# Altium PCB 夏友.PcbDoc (part 4 of 6)
Units mm, origin at the board's own origin, x right, y up, seen from the top; angles counter-clockwise.
Board outline 130.55 x 65.02 mm, 2 copper layers (Top Layer, Bottom Layer); 162 components, 175 nets, 628 pads, 694 vias.
Unrouted connection lines stored in the file: 1.
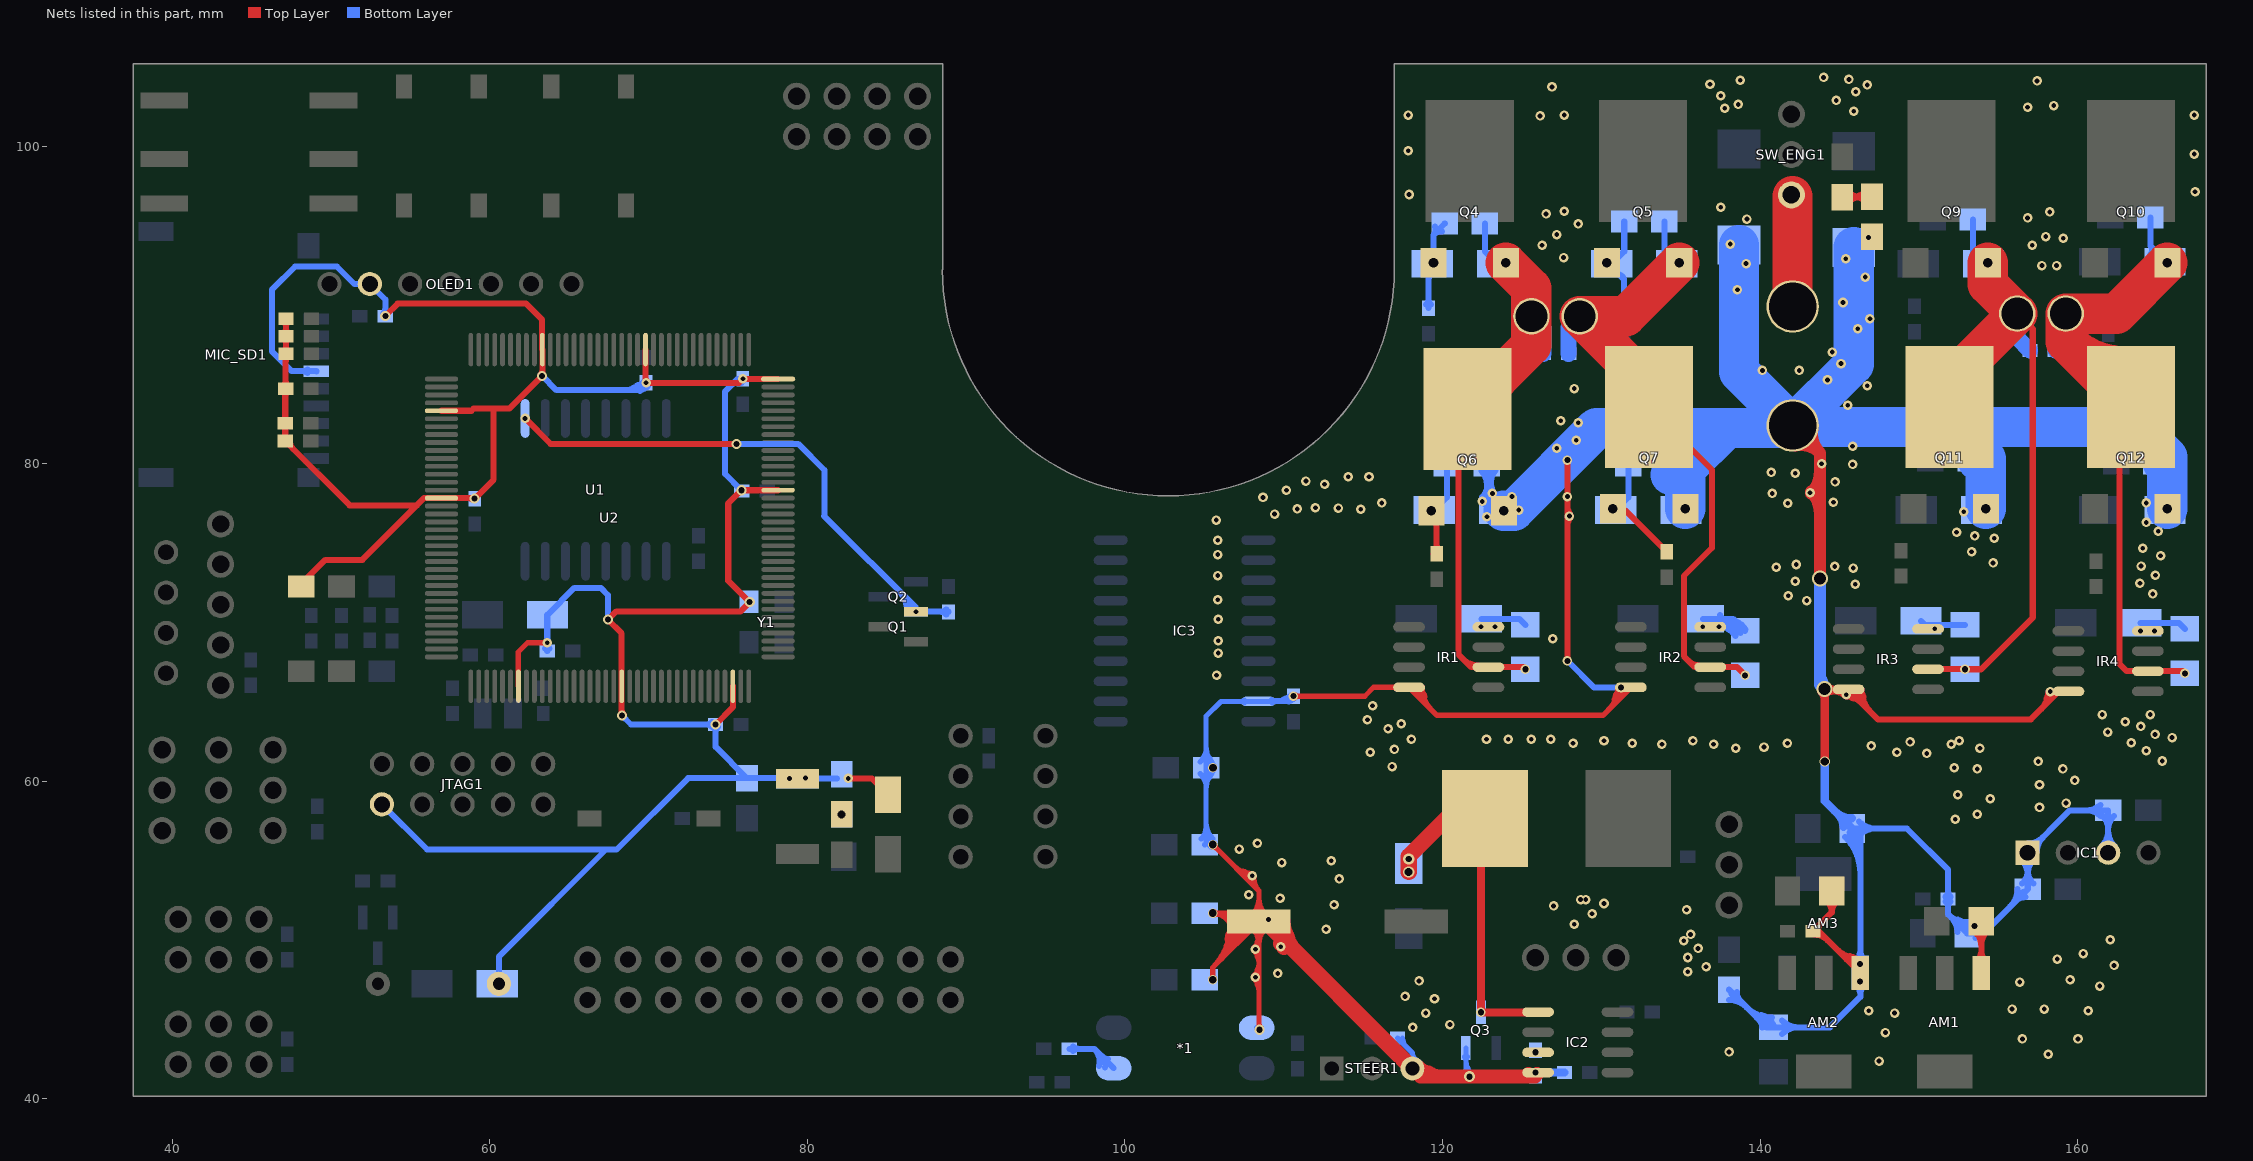
[diagram p4: the nets of this part, all layers, seen from the top]

## Via types
v1: diameter 0.6, hole 0.3, Top Layer to Bottom Layer, 442 vias
v2: diameter 0.635, hole 0.381, Top Layer to Bottom Layer, 150 vias
v3: diameter 0.6, hole 0.381, Top Layer to Bottom Layer, 48 vias
v4: diameter 0.7, hole 0.6, Top Layer to Bottom Layer, 16 vias
v5: diameter 0.6, hole 0.5, Top Layer to Bottom Layer, 10 vias
v6: diameter 0.6, hole 0.4, Top Layer to Bottom Layer, 7 vias
v7: diameter 0.7, hole 0.5, Top Layer to Bottom Layer, 5 vias
v8: diameter 0.6, hole 0.33, Top Layer to Bottom Layer, 5 vias
v9: diameter 0.7, hole 0.4, Top Layer to Bottom Layer, 3 vias
v10: diameter 1, hole 1, Top Layer to Bottom Layer, 2 vias
v11: diameter 3, hole 3, Top Layer to Bottom Layer, 2 vias
v12: diameter 1.016, hole 0.762, Top Layer to Bottom Layer, 2 vias
v13: diameter 0.7, hole 0.381, Top Layer to Bottom Layer, 1 vias
v14: diameter 0.635, hole 0.508, Top Layer to Bottom Layer, 1 vias

## Nets (pads, with @x,y where several pads share a name; then routed paths per layer and width w, separated by ;. In a path a pad name is that pad's centre, name@x,y a point inside that pad or via, vN(x,y) a via of type N, cw(c..) or ccw(c..) an arc to the next point about the centre after c; other vN are vias at no path point) (continued)
GND: *1.3 AM1.1 AM2.1 AM3.1 C2.1 C7.2 C8.2 C9.2 C10.2 C12.2 C14.2 CA1.2 CA2.2 CA3.2 CA4.2 CIN1.2 CO1.2 CO2.2 CO3.2 CON1.1 D11.1 D12.1 D18.1 D19.1 IC1.1 IC1.3 IC2.4 IC3.19 IR1.4 IR2.4 IR3.4 IR4.4 Q3.3 Q6.3 Q7.3 Q11.3 Q12.3 R2.2 R7.2 R8.1 R9.2 R19.2 R20.2 R28.2 R29.2 R30.2 R31.2 R38.2 R40.2 STEER1.3 | length 673.1
  Top Layer w0.33: v5(105.537,47.498) 105.537,48.266 ; v5(105.537,56.007) 108.446,53.098 ; 106.43,50.039 cw(c108.234,49.738) CIN1.2@107.171,51.227 ; 106.712,49.983 cw(c108.206,49.689) CIN1.2@107.357,50.954 ; CIN1.2@106.713,50.842 cw(c106.247,50.529) CIN1.2@106.798,50.421 ; CIN1.2@106.833,50.711 cw(c106.43,50.214) 107.058,50.091 cw(c107.83,49.939) CIN1.2@107.476,50.642 ; 107.44,54.342 cw(c107.241,53.597) v1@107.908,53.983 ; v1@107.937,53.947 cw(c107.438,53.361) 108.206,53.422 ; v1@108.348,47.595 ccw(c108.81,47.388) 108.372,47.135 ; v1@108.348,47.705 cw(c108.81,47.912) 108.372,48.165 ; v1@108.348,49.37 ccw(c108.81,49.163) 108.372,48.91 ; v1@108.348,49.48 cw(c108.81,49.687) 108.372,49.94 ; v2(108.475,44.35) 108.446,44.379 CIN1.2@108.446,51.175 ; v3(110.617,65.354) 115.104,65.354 115.675,65.925 117.884,65.925 IR1.4@117.896,65.913 119.659,64.15 130.103,64.15 IR2.4@131.866,65.913 ; IR1.4@118.529,65.796 cw(c118.143,65.129) 118.888,65.328 ; 130.874,65.328 cw(c131.619,65.129) 131.233,65.796 ccw(c131.474,65.379) 131.009,65.504 ; 130.958,65.315 cw(c131.703,65.116) IR2.4@131.317,65.783 ; 130.958,65.521 ccw(c130.579,65.9) IR2.4@131.115,65.9 ; IR2.4@131.039,65.869 cw(c130.606,65.719) 130.93,65.396 ccw(c130.478,65.847) IR2.4@131.115,65.891 ; 131.057,65.62 ccw(c130.882,65.795) IR2.4@131.12,65.863 ; 105.537,47.824 cw(c105.211,47.824) 105.442,47.593 ccw(c105.211,47.824) 105.537,47.824 ; 105.537,47.824 ccw(c105.863,47.824) 105.632,47.593 cw(c105.863,47.824) 105.537,47.824 ; 105.537,48.266 ccw(c102.92,50.883) 106.613,51.134 cw(c102.92,50.883) 105.537,48.266 ; 105.537,48.266 CIN1.2@108.446,51.175 ; v5(105.537,51.689) cw(c105.537,50.473) 106.658,50.944 ccw(c105.537,50.473) v5(105.537,51.689) ; v5(105.537,51.689) 107.932,51.689 CIN1.2@108.446,51.175 ; v5@105.604,51.572 cw(c105.767,51.29) 105.852,51.605 ; v5@105.604,51.572 cw(c105.767,51.29) 105.852,51.605 ; v5@105.604,51.572 cw(c105.767,51.29) 105.852,51.605 ; v5@105.654,51.756 ccw(c105.936,51.919) 105.852,51.605 ; v5@105.654,51.756 ccw(c105.936,51.919) 105.852,51.605 ; v5@105.654,51.756 ccw(c105.936,51.919) 105.852,51.605 ; 105.767,55.777 cw(c105.998,56.007) 105.672,56.007 ccw(c105.998,56.007) 105.767,55.777 ; 105.767,55.777 ccw(c105.537,55.546) 105.537,55.872 cw(c105.537,55.546) 105.767,55.777 ; 105.863,51.689 cw(c105.863,52.015) 105.632,51.784 ccw(c105.863,52.015) 105.863,51.689 ; 105.863,51.689 ccw(c105.863,51.363) 105.632,51.594 cw(c105.863,51.363) 105.863,51.689 ; 108.446,49.734 cw(c109.887,49.734) 108.868,50.753 ccw(c109.887,49.734) 108.446,49.734 ; 108.446,49.734 ccw(c107.005,49.734) 108.024,50.753 cw(c107.005,49.734) 108.446,49.734 ; CIN1.2@108.446,51.175 108.446,53.098 ; 108.446,52.616 cw(c107.005,52.616) 108.024,51.597 ccw(c107.005,52.616) 108.446,52.616 ; 108.446,52.616 ccw(c109.887,52.616) 108.868,51.597 cw(c109.887,52.616) 108.446,52.616 ; 108.446,53.098 cw(c109.184,53.836) 108.158,54.026 ccw(c109.184,53.836) 108.446,53.098 ; CIN1.2@108.869,51.596 ccw(c109.177,51.774) CIN1.2@109.085,51.43 ; CIN1.2@108.869,51.596 ccw(c109.177,51.774) CIN1.2@109.085,51.43 ; CIN1.2@108.869,51.596 ccw(c109.177,51.774) CIN1.2@109.085,51.43 ; CIN1.2@108.869,51.596 ccw(c109.177,51.774) CIN1.2@109.085,51.43 ; CIN1.2@108.869,51.596 ccw(c109.177,51.774) CIN1.2@109.085,51.43 ; CIN1.2@108.869,51.596 ccw(c109.177,51.774) CIN1.2@109.085,51.43 ; CIN1.2@108.89,51.559 cw(c108.634,51.411) CIN1.2@108.92,51.335 ; CIN1.2@108.89,51.559 cw(c108.634,51.411) CIN1.2@108.92,51.335 ; CIN1.2@108.89,51.559 cw(c108.634,51.411) CIN1.2@108.92,51.335 ; CIN1.2@108.89,51.559 cw(c108.634,51.411) CIN1.2@108.92,51.335 ; CIN1.2@108.89,51.559 cw(c108.634,51.411) CIN1.2@108.92,51.335 ; CIN1.2@108.89,51.559 cw(c108.634,51.411) CIN1.2@108.92,51.335 ; 110.943,65.354 cw(c110.943,65.68) 110.712,65.45 ccw(c110.943,65.68) 110.943,65.354 ; 110.943,65.354 ccw(c110.943,65.029) 110.712,65.259 cw(c110.943,65.029) 110.943,65.354 ; 130.824,65.14 cw(c131.847,64.866) IR2.4@131.317,65.783 ; 130.824,65.14 cw(c131.847,64.866) IR2.4@131.317,65.783 ; 130.824,65.14 cw(c131.847,64.866) IR2.4@131.317,65.783 ; IR2.4@131.115,65.9 cw(c129.334,65.9) 130.593,64.64 ccw(c129.334,65.9) IR2.4@131.115,65.9 ; IR2.4@131.156,65.804 cw(c130.922,65.565) 131.245,65.478 ; IR2.4@131.156,65.804 cw(c130.922,65.565) 131.245,65.478 ; IR2.4@131.156,65.804 cw(c130.922,65.565) 131.245,65.478 ; 106.034,51.689 cw(c106.034,50.682) 106.962,51.072 ccw(c106.034,50.682) 106.034,51.689 ; 106.051,48.78 ccw(c103.882,50.949) 106.942,51.157 cw(c103.882,50.949) 106.051,48.78 ; CIN1.2@106.531,51.689 cw(c106.531,50.891) 107.267,51.2 ccw(c106.531,50.891) CIN1.2@106.531,51.689 ; 106.564,49.293 ccw(c104.843,51.014) 107.272,51.179 cw(c104.843,51.014) 106.564,49.293 ; 106.888,54.656 ccw(c108.025,55.793) 108.025,54.185 cw(c108.025,55.793) 106.888,54.656 ; 107.078,49.807 ccw(c105.805,51.08) 107.601,51.202 cw(c105.805,51.08) 107.078,49.807 ; 107.452,54.092 ccw(c108.025,54.665) 108.025,53.855 cw(c108.025,54.665) 107.452,54.092 ; 107.592,50.32 ccw(c106.767,51.145) 107.93,51.224 cw(c106.767,51.145) 107.592,50.32 ; v1@107.833,54.085 ccw(c108.434,53.975) 108.002,53.542 cw(c108.434,53.975) v1@107.833,54.085 ; CIN1.2@108.105,50.834 ccw(c107.729,51.21) 108.26,51.247 cw(c107.729,51.21) CIN1.2@108.105,50.834 ; v1@108.13,47.555 cw(c107.365,46.79) 108.446,46.79 ccw(c107.365,46.79) v1@108.13,47.555 ; v1@108.13,47.745 ccw(c107.365,48.51) 108.446,48.51 cw(c107.365,48.51) v1@108.13,47.745 ; v1@108.13,49.33 cw(c107.365,48.565) 108.446,48.565 ccw(c107.365,48.565) v1@108.13,49.33 ; v1@108.13,49.52 ccw(c107.365,50.285) 108.446,50.285 cw(c107.365,50.285) v1@108.13,49.52 ; 108.446,44.787 ccw(c108.912,44.787) 108.583,44.458 cw(c108.912,44.787) 108.446,44.787 ; 116.841,65.925 cw(c116.841,65.558) 117.101,65.818 ccw(c116.841,65.558) 116.841,65.925 ; IR1.4@118.07,65.913 ccw(c118.492,65.913) 118.194,65.615 cw(c118.492,65.913) IR1.4@118.07,65.913 ; IR1.4@118.401,65.913 ccw(c119.619,65.913) 118.758,65.051 cw(c119.619,65.913) IR1.4@118.401,65.913 ; IR1.4@118.731,65.913 ccw(c120.747,65.913) 119.321,64.488 cw(c120.747,65.913) IR1.4@118.731,65.913 ; 130.441,64.488 ccw(c129.015,65.913) 131.031,65.913 cw(c129.015,65.913) 130.441,64.488 ; 131.004,65.051 ccw(c130.143,65.913) 131.361,65.913 cw(c130.143,65.913) 131.004,65.051 ; 131.157,65.204 ccw(c130.461,65.9) 131.445,65.9 cw(c130.461,65.9) 131.157,65.204 ; IR2.4@131.568,65.615 ccw(c131.27,65.913) 131.691,65.913 cw(c131.27,65.913) IR2.4@131.568,65.615
  Top Layer w0.381: v3(127.875,67.575) v3(127.875,80.225) ; v1@127.913,76.634 cw(c127.718,76.487) 127.929,76.366 ; v1@127.913,76.766 ccw(c127.718,76.913) 127.929,77.034 ; v12@144.064,65.786 IR3.4@145.582,65.786 ; v12@144.211,65.526 cw(c144.698,64.694) IR3.4@144.948,65.626 ; v12@144.325,65.959 ccw(c144.8,66.233) IR3.4@144.658,65.703 ; CA4.2@144.529,53.086 144.529,51.743 ; 144.56,65.726 cw(c144.651,65.386) IR3.4@144.827,65.691 ; IR3.4@144.922,65.618 ccw(c145.235,66.16) IR3.4@145.397,65.556 ; IR3.4@145.52,65.505 ccw(c146.062,65.817) 145.9,65.213 ; 145.648,48.995 cw(c145.355,47.9) AM2.1@146.337,48.467 ; AM2.1@145.825,48.737 cw(c145.663,48.133) AM2.1@146.205,48.445 ; AM2.1@145.971,48.362 ccw(c145.662,48.279) 145.745,48.588 ccw(c145.819,48.863) AM2.1@146.039,48.683 ; IR3.4@146.227,65.691 cw(c145.914,65.149) 146.519,65.311 ; AM2.1@146.318,47.931 143.703,50.546 CA2.2@143.332,50.546 144.529,51.743 ; CO1.2@153.443,50.782 cw(c153.264,50.49) CO1.2@153.606,50.49 ; CO1.2@153.522,50.768 cw(c153.609,50.342) CO1.2@153.985,50.559 ; CO1.2@153.668,50.372 cw(c154.21,50.685) CO1.2@153.606,50.847 ; CO1.2@153.927,51.181 153.938,51.17 AM1.1@153.938,47.931 ; 158.038,65.175 cw(c158.642,65.013) v1@158.33,65.555 ; IR4.4@159.425,65.659 158.809,65.659 157.05,63.9 147.425,63.9 145.582,65.743 IR3.4@145.582,65.786 ; 144.529,51.743 cw(c145.492,51.743) 144.902,52.504 ccw(c145.492,51.743) 144.529,51.743 ; 144.529,51.743 ccw(c143.566,51.743) 144.156,52.504 cw(c143.566,51.743) 144.529,51.743 ; IR3.4@145.582,65.786 cw(c145.346,65.786) 145.4,65.557 ccw(c145.346,65.786) IR3.4@145.582,65.786 ; AM2.1@145.893,48.548 ccw(c146.013,48.997) AM2.1@146.245,48.595 ; AM2.1@145.893,48.548 ccw(c146.013,48.997) AM2.1@146.245,48.595 ; AM2.1@145.893,48.548 ccw(c146.013,48.997) AM2.1@146.245,48.595 ; CO1.2@153.606,50.847 ccw(c154.243,50.676) CO1.2@153.672,50.346 ; CO1.2@153.606,50.847 ccw(c154.243,50.676) CO1.2@153.672,50.346 ; CO1.2@153.606,50.847 ccw(c154.243,50.676) CO1.2@153.672,50.346 ; 153.938,49.324 cw(c153.07,49.324) 153.684,48.71 ccw(c153.07,49.324) 153.938,49.324 ; 153.938,49.324 ccw(c154.806,49.324) 154.192,48.71 cw(c154.806,49.324) 153.938,49.324 ; v1@158.288,65.379 ccw(c158.271,65.728) IR4.4@158.607,65.63 ; v1@158.288,65.379 ccw(c158.271,65.728) IR4.4@158.607,65.63 ; v1@158.288,65.379 ccw(c158.271,65.728) IR4.4@158.607,65.63 ; 127.875,76.134 cw(c128.566,76.134) 128.077,76.623 ccw(c128.566,76.134) 127.875,76.134 ; 127.875,77.266 ccw(c128.566,77.266) 128.077,76.777 cw(c128.566,77.266) 127.875,77.266 ; CA2.2@143.415,50.337 cw(c143.415,49.135) 144.264,49.985 ccw(c143.415,49.135) CA2.2@143.415,50.337 ; CA2.2@143.624,50.546 cw(c144.329,50.546) 143.831,51.044 ccw(c144.329,50.546) CA2.2@143.624,50.546 ; v12@144.275,65.575 cw(c144.783,65.067) 144.783,65.786 ccw(c144.783,65.067) v12@144.275,65.575 ; v12@144.275,66.025 ccw(c144.85,66.6) 144.85,65.786 cw(c144.85,66.6) v12@144.275,66.025 ; v12@144.349,65.786 cw(c144.349,64.374) 145.348,65.373 ccw(c144.349,64.374) v12@144.349,65.786 ; 144.808,49.441 ccw(c146.318,50.951) 146.318,48.815 cw(c146.318,50.951) 144.808,49.441 ; 145.172,49.077 ccw(c146.3,50.204) 146.3,48.609 cw(c146.3,50.204) 145.172,49.077 ; IR3.4@145.269,65.786 cw(c145.269,65.294) 145.617,65.642 ccw(c145.269,65.294) IR3.4@145.269,65.786 ; v1@145.425,65.341 cw(c145.425,63.99) 146.38,64.945 ccw(c145.425,63.99) v1@145.425,65.341 ; IR3.4@145.425,65.722 cw(c145.425,65.291) 145.73,65.595 ccw(c145.425,65.291) IR3.4@145.425,65.722 ; 145.458,48.791 ccw(c146.318,49.65) 146.318,48.434 cw(c146.318,49.65) 145.458,48.791 ; IR3.4@145.629,65.786 ccw(c145.848,65.786) 145.693,65.632 cw(c145.848,65.786) IR3.4@145.629,65.786 ; AM2.1@145.823,48.426 ccw(c146.3,48.903) 146.3,48.228 cw(c146.3,48.903) AM2.1@145.823,48.426 ; IR3.4@146.01,65.786 ccw(c147.149,65.786) 146.344,64.981 cw(c147.149,65.786) IR3.4@146.01,65.786 ; IR3.4@146.391,65.786 ccw(c148.45,65.786) 146.994,64.331 cw(c148.45,65.786) IR3.4@146.391,65.786 ; CO1.2@153.423,50.798 cw(c152.178,49.553) 153.938,49.553 ccw(c152.178,49.553) CO1.2@153.423,50.798 ; CO1.2@153.496,50.65 cw(c152.429,49.583) 153.938,49.583 ccw(c152.429,49.583) CO1.2@153.496,50.65 ; CO1.2@153.692,51.067 cw(c153.098,50.473) 153.938,50.473 ccw(c153.098,50.473) CO1.2@153.692,51.067 ; 153.938,49.636 cw(c155.372,49.636) 154.358,50.65 ccw(c155.372,49.636) 153.938,49.636 ; 157.717,64.567 ccw(c156.634,65.65) 158.166,65.65 cw(c156.634,65.65) 157.717,64.567 ; 158.367,65.217 ccw(c157.934,65.65) 158.547,65.65 cw(c157.934,65.65) 158.367,65.217 ; 158.479,65.329 ccw(c158.148,65.659) 158.615,65.659 cw(c158.148,65.659) 158.479,65.329
  Top Layer w0.508: v12(144.05,65.8) 144.064,65.786 144.075,65.775 v14(144.075,61.25) ; v12@143.87,65.62 cw(c143.376,65.126) 144.075,65.126 ccw(c143.376,65.126) v12@143.87,65.62 ; 144.075,65.247 cw(c144.603,65.247) 144.23,65.62 ccw(c144.603,65.247) 144.075,65.247
  Top Layer w0.762: CON1.1@142.05,82.406 143.775,80.681 ; v12(143.775,72.775) 143.775,80.681 ; 143.775,80.681 cw(c144.984,81.89) 143.3,82.186 ccw(c144.984,81.89) 143.775,80.681 ; 143.775,80.681 ccw(c142.566,79.472) 142.27,81.156 cw(c142.566,79.472) 143.775,80.681 ; v1@143.207,78.118 ccw(c141.837,79.488) 143.775,79.488 cw(c141.837,79.488) v1@143.207,78.118 ; v1@143.207,78.232 cw(c141.837,76.862) 143.775,76.862 ccw(c141.837,76.862) v1@143.207,78.232
  Top Layer w0.889: STEER1.3@118.11,41.91 118.62,41.4 v9(121.7,41.4) IC2.4@125.818,41.4 ; STEER1.3@118.232,41.63 cw(c118.701,40.55) 119.29,41.57 ; STEER1.3@118.326,42.126 ccw(c120.079,43.879) 120.079,41.4 cw(c120.079,43.879) STEER1.3@118.326,42.126 ; 125.055,41.4 ccw(c125.055,41.925) 125.426,41.554 cw(c125.055,41.925) 125.055,41.4 ; IC2.4@125.588,41.4 ccw(c125.588,41.925) 125.959,41.554 cw(c125.588,41.925) IC2.4@125.588,41.4
  Top Layer w1.016: CIN1.2@108.446,51.175 108.845,51.175 STEER1.3@118.11,41.91 ; CIN1.2@109.557,50.955 cw(c108.832,49.699) 110.233,50.074 ; 109.742,50.278 cw(c109.038,49.575) 110.033,49.575 ccw(c109.038,49.575) 109.742,50.278 ; v1@109.825,49.783 cw(c109.825,48.788) 110.528,49.492 ccw(c109.825,48.788) v1@109.825,49.783 ; CIN1.2@109.938,51.175 ccw(c112.577,51.175) 110.711,49.309 cw(c112.577,51.175) CIN1.2@109.938,51.175
  Bottom Layer w0.33: R28.2@105.024,56.007 105.115,56.098 R31.2@105.115,60.85 105.115,64.09 106.049,65.024 IC3.19@108.409,65.024 110.287,65.024 v3(110.617,65.354) ; R28.2@105.094,56.398 ccw(c105.537,56.654) R28.2@105.537,56.142 ; R31.2@105.095,60.439 cw(c105.573,60.163) R31.2@105.555,60.715 ; R31.2@105.095,61.261 ccw(c105.573,61.537) R31.2@105.555,60.985 ; R28.2@105.33,56.627 cw(c104.662,56.241) R28.2@105.407,56.042 ; R31.2@105.343,60.23 ccw(c104.675,60.616) R31.2@105.42,60.815 ; R31.2@105.343,61.47 cw(c104.675,61.084) R31.2@105.42,60.885 ; *1.3@108.3,44.47 108.42,44.35 v2(108.475,44.35) ; 109.931,65.138 cw(c110.166,64.731) C14.2@110.466,65.091 ; 110.165,65.224 cw(c110.165,64.82) C14.2@110.451,65.106 ; C14.2@110.411,65.385 cw(c110.139,65.535) 110.139,65.224 ccw(c110.139,65.653) C14.2@110.503,65.426 ; C2.1@117.175,43.825 118.11,42.89 ; STEER1.3@118.11,41.91 118.11,42.89 ; Q3.3@121.478,43.198 121.478,41.572 121.669,41.424 v9(121.7,41.4) ; R8.1@121.549,41.507 ccw(c121.189,41.761) 121.571,41.981 ; 105.115,59.595 cw(c106.37,59.595) 105.483,60.482 ccw(c106.37,59.595) 105.115,59.595 ; 105.115,59.595 ccw(c103.86,59.595) 104.747,60.482 cw(c103.86,59.595) 105.115,59.595 ; 105.115,62.105 cw(c103.86,62.105) 104.747,61.218 ccw(c103.86,62.105) 105.115,62.105 ; 105.115,62.105 ccw(c106.37,62.105) 105.483,61.218 cw(c106.37,62.105) 105.115,62.105 ; 107.308,65.024 cw(c107.308,64.698) 107.539,64.929 ccw(c107.308,64.698) 107.308,65.024 ; 107.308,65.024 ccw(c107.308,65.35) 107.539,65.119 cw(c107.308,65.35) 107.308,65.024 ; IC3.19@109.251,65.141 ccw(c109.533,65.628) 109.678,65.085 ; IC3.19@109.251,65.141 ccw(c109.533,65.628) 109.678,65.085 ; IC3.19@109.251,65.141 ccw(c109.533,65.628) 109.678,65.085 ; 109.51,65.024 cw(c109.51,65.35) 109.279,65.119 ccw(c109.51,65.35) 109.51,65.024 ; 109.51,65.024 ccw(c109.51,64.698) 109.279,64.929 cw(c109.51,64.698) 109.51,65.024 ; 109.932,65.138 cw(c110.36,64.397) C14.2@110.582,65.224 ; 109.932,65.138 cw(c110.36,64.397) C14.2@110.582,65.224 ; 109.932,65.138 cw(c110.36,64.397) C14.2@110.582,65.224 ; C14.2@110.327,64.998 ccw(c110.165,65.278) C14.2@110.484,65.332 ; C14.2@110.327,64.998 ccw(c110.165,65.278) C14.2@110.484,65.332 ; C14.2@110.327,64.998 ccw(c110.165,65.278) C14.2@110.484,65.332 ; C14.2@110.387,65.124 cw(c110.617,64.894) 110.617,65.219 ccw(c110.617,64.894) C14.2@110.387,65.124 ; C14.2@110.387,65.124 ccw(c110.156,65.354) 110.482,65.354 cw(c110.156,65.354) C14.2@110.387,65.124 ; 118.11,42.89 cw(c117.582,42.89) 117.832,42.425 ccw(c117.582,42.89) 118.11,42.89 ; 118.11,42.89 ccw(c118.638,42.89) 118.388,42.425 cw(c118.638,42.89) 118.11,42.89 ; 121.478,42.422 cw(c121.804,42.422) 121.573,42.653 ccw(c121.804,42.422) 121.478,42.422 ; 121.478,42.422 ccw(c121.152,42.422) 121.383,42.653 cw(c121.152,42.422) 121.478,42.422 ; R8.1@121.54,41.493 ccw(c121.186,41.697) 121.54,41.901 ; R8.1@121.54,41.493 ccw(c121.186,41.697) 121.54,41.901 ; R8.1@121.54,41.493 ccw(c121.186,41.697) 121.54,41.901 ; R28.2@104.806,56.375 ccw(c104.061,57.12) 105.115,57.12 cw(c104.061,57.12) R28.2@104.806,56.375 ; R28.2@105.115,56.554 ccw(c106.084,56.554) 105.399,55.869 cw(c106.084,56.554) R28.2@105.115,56.554 ; 105.115,57.351 ccw(c106.881,57.351) 105.632,56.102 cw(c106.881,57.351) 105.115,57.351 ; 105.115,57.405 ccw(c106.572,57.405) 105.542,56.375 cw(c106.572,57.405) 105.115,57.405 ; 105.115,59.474 cw(c106.926,59.474) 105.645,60.755 ccw(c106.926,59.474) 105.115,59.474 ; R31.2@105.115,60.271 cw(c106.129,60.271) 105.412,60.988 ccw(c106.129,60.271) R31.2@105.115,60.271 ; R31.2@105.115,61.429 ccw(c106.129,61.429) 105.412,60.712 cw(c106.129,61.429) R31.2@105.115,61.429 ; 105.115,62.226 ccw(c106.926,62.226) 105.645,60.945 cw(c106.926,62.226) 105.115,62.226 ; IC3.19@109.452,65.024 ccw(c109.452,66.437) 110.451,65.438 cw(c109.452,66.437) IC3.19@109.452,65.024 ; C14.2@110.249,65.024 ccw(c110.249,65.64) 110.684,65.204 cw(c110.249,65.64) C14.2@110.249,65.024 ; C2.1@117.257,43.59 cw(c117.257,43.222) 117.518,43.482 ccw(c117.257,43.222) C2.1@117.257,43.59 ; C2.1@117.492,43.825 ccw(c118.259,43.825) 117.717,43.283 cw(c118.259,43.825) C2.1@117.492,43.825 ; 121.478,42.183 ccw(c122.351,42.183) 121.734,41.566 cw(c122.351,42.183) 121.478,42.183 ; 121.478,42.382 ccw(c122.682,42.382) 121.831,41.531 cw(c122.682,42.382) 121.478,42.382
  Bottom Layer w0.381: D11.1@122.55,77.722 ccw(c122.687,77.99) D11.1@122.908,77.786 ; D11.1@122.593,77.683 ccw(c123.123,78.015) D11.1@122.983,77.406 ; D11.1@122.606,77.653 cw(c123.21,77.815) 122.668,78.128 ; D11.1@122.799,77.668 ccw(c122.648,77.906) 122.892,78.047 ccw(c123.406,78.343) D11.1@123.294,77.761 ; R19.2@122.804,79.883 122.804,77.874 D11.1@123.589,77.089 ; v1@122.955,78.036 ccw(c123.478,78.338) D11.1@123.331,77.753 ; 122.982,78.628 cw(c122.44,78.315) v1@123.044,78.153 ; v1@123.081,78.04 cw(c122.687,77.554) D11.1@123.309,77.619 ; D11.1@123.228,77.715 ccw(c124.202,78.278) D11.1@123.911,77.19 ; D11.1@123.291,77.261 ccw(c123.645,77.875) D11.1@123.829,77.19 ; v3(127.875,67.575) 129.55,65.9 v3(131.25,65.9) ; R2.2@138.049,46.868 140.417,44.5 CO2.2@140.85,44.5 144.4,44.5 146.325,46.425 146.318,46.432 AM3.1@146.318,47.954 ; R2.2@138.157,46.752 ccw(c139.258,47.092) 138.96,45.98 ; CO2.2@140.074,45.291 cw(c139.76,44.119) CO2.2@140.892,44.555 ; CO3.2@145.641,56.334 cw(c145.455,55.641) 146.077,56 ; 146.175,55.83 cw(c146.678,56.121) CO3.2@146.249,56.512 ; AM3.1@146.318,48.5 146.318,56.504 CO3.2@145.799,57.023 149.252,57.023 151.85,54.425 151.85,52.587 CA1.2@151.841,52.578 151.841,51.616 ; CA3.2@152.451,51.279 cw(c152.194,50.282) CA3.2@153.185,50.56 ; D18.1@154.075,77.016 v4(154.223,77.163) ; 155.972,52.289 cw(c157.084,51.991) C10.2@156.744,53.092 ; IC1.3@161.925,55.499 161.925,58.161 159.507,58.161 IC1.1@156.845,55.499 156.86,55.484 C10.2@156.86,53.2 154.079,50.419 ; R19.2@122.707,79.455 cw(c122.478,79.058) 122.92,79.176 ; R19.2@122.707,79.455 cw(c122.478,79.058) 122.92,79.176 ; R19.2@122.707,79.455 cw(c122.478,79.058) 122.92,79.176 ; 122.804,78.689 cw(c123.998,78.689) 123.154,79.533 ccw(c123.998,78.689) 122.804,78.689 ; 122.804,78.689 ccw(c121.61,78.689) 122.454,79.533 cw(c121.61,78.689) 122.804,78.689 ; v1@123.054,78.178 ccw(c122.621,78.415) 123.095,78.553 ; v1@123.054,78.178 ccw(c122.621,78.415) 123.095,78.553 ; v1@123.054,78.178 ccw(c122.621,78.415) 123.095,78.553 ; 123.094,78.53 cw(c124.185,78.823) R19.2@123.329,79.56 ; 123.094,78.53 cw(c124.185,78.823) R19.2@123.329,79.56 ; 123.094,78.53 cw(c124.185,78.823) R19.2@123.329,79.56 ; v1@123.137,78.016 cw(c123.085,77.582) D11.1@123.429,77.852 ; v1@123.137,78.016 cw(c123.085,77.582) D11.1@123.429,77.852 ; v1@123.137,78.016 cw(c123.085,77.582) D11.1@123.429,77.852 ; v1@123.252,78.085 ccw(c123.96,77.808) D11.1@123.316,77.403 ; v1@123.252,78.085 ccw(c123.96,77.808) D11.1@123.316,77.403 ; v1@123.252,78.085 ccw(c123.96,77.808) D11.1@123.316,77.403 ; D11.1@123.589,77.089 cw(c124.423,77.923) 123.258,78.108 ccw(c124.423,77.923) D11.1@123.589,77.089 ; D11.1@123.589,77.089 ccw(c122.557,76.057) 122.504,77.516 cw(c122.557,76.057) D11.1@123.589,77.089 ; 142.421,44.5 cw(c142.421,45.971) 141.381,44.931 ccw(c142.421,45.971) 142.421,44.5 ; 142.421,44.5 ccw(c142.421,43.029) 141.381,44.069 cw(c142.421,43.029) 142.421,44.5 ; 146.318,46.561 cw(c147.186,46.561) 146.572,47.175 ccw(c147.186,46.561) 146.318,46.561 ; 146.318,46.561 ccw(c145.45,46.561) 146.064,47.175 cw(c145.45,46.561) 146.318,46.561 ; 146.318,49.347 cw(c145.45,49.347) 146.064,48.733 ccw(c145.45,49.347) 146.318,49.347 ; 146.318,49.347 ccw(c147.186,49.347) 146.572,48.733 cw(c147.186,49.347) 146.318,49.347 ; 147.27,57.023 cw(c147.27,58.494) 146.23,57.454 ccw(c147.27,58.494) 147.27,57.023 ; 147.27,57.023 ccw(c147.27,55.552) 146.23,56.592 cw(c147.27,55.552) 147.27,57.023 ; 151.841,51.616 ccw(c153.018,52.792) 153.033,51.128 cw(c153.018,52.792) 151.841,51.616 ; 151.841,51.616 CA3.2@153.038,50.419 154.079,50.419 ; 151.841,52.072 cw(c152.347,52.072) 151.989,52.43 ccw(c152.347,52.072) 151.841,52.072 ; 151.841,52.072 ccw(c151.335,52.072) 151.693,52.43 cw(c151.335,52.072) 151.841,52.072 ; CA3.2@153.609,50.874 ccw(c154.08,50.868) CA3.2@153.743,50.539 ; CA3.2@153.609,50.874 ccw(c154.08,50.868) CA3.2@153.743,50.539 ; CA3.2@153.609,50.874 ccw(c154.08,50.868) CA3.2@153.743,50.539 ; 154.079,50.419 cw(c154.079,50.889) 153.609,50.878 ccw(c154.079,50.889) 154.079,50.419 ; 154.079,50.419 cw(c154.079,51.003) 153.57,50.717 ccw(c154.079,51.003) 154.079,50.419 ; 154.079,50.419 ccw(c154.079,49.835) 153.57,50.121 cw(c154.079,49.835) 154.079,50.419 ; 156.86,54.394 cw(c155.666,54.394) 156.51,53.55 ccw(c155.666,54.394) 156.86,54.394 ; 156.86,54.394 ccw(c158.054,54.394) 157.21,53.55 cw(c158.054,54.394) 156.86,54.394 ; 157.821,56.475 cw(c156.845,57.45) 156.845,56.07 ccw(c156.845,57.45) 157.821,56.475 ; 157.821,56.475 ccw(c158.796,55.499) 157.416,55.499 cw(c158.796,55.499) 157.821,56.475 ; 161.925,56.879 cw(c160.545,56.879) 161.521,55.903 ccw(c160.545,56.879) 161.925,56.879 ; 161.925,56.879 ccw(c163.305,56.879) 162.329,55.903 cw(c163.305,56.879) 161.925,56.879 ; D11.1@122.423,77.702 ccw(c121.502,78.623) 122.804,78.623 cw(c121.502,78.623) D11.1@122.423,77.702 ; D11.1@122.49,77.896 cw(c122.514,77.251) 122.971,77.707 ccw(c122.514,77.251) D11.1@122.49,77.896 ; D11.1@122.692,77.433 ccw(c122.422,77.703) 122.804,77.703 cw(c122.422,77.703) D11.1@122.692,77.433 ; 122.804,78.305 ccw(c123.33,78.305) 122.958,77.933 cw(c123.33,78.305) 122.804,78.305 ; 122.804,78.691 ccw(c124.766,78.691) 123.379,77.304 cw(c124.766,78.691) 122.804,78.691 ; R19.2@122.804,79.225 ccw(c124.25,79.225) 123.227,78.202 cw(c124.25,79.225) R19.2@122.804,79.225 ; R19.2@122.804,79.611 ccw(c125.686,79.611) 123.648,77.573 cw(c125.686,79.611) R19.2@122.804,79.611 ; v1@122.882,78.168 ccw(c123.511,78.068) 123.06,77.618 cw(c123.511,78.068) v1@122.882,78.168 ; D11.1@123.208,77.47 ccw(c123.87,78.132) 123.87,77.196 cw(c123.87,78.132) D11.1@123.208,77.47 ; R2.2@138.049,46.223 cw(c138.049,44.668) 139.149,45.768 ccw(c138.049,44.668) R2.2@138.049,46.223 ; R2.2@138.543,46.718 ccw(c139.375,46.718) 138.787,46.13 cw(c139.375,46.718) R2.2@138.543,46.718 ; 139.141,45.776 ccw(c140.75,47.385) 140.75,45.109 cw(c140.75,47.385) 139.141,45.776 ; 139.791,45.126 ccw(c140.75,46.084) 140.75,44.728 cw(c140.75,46.084) 139.791,45.126 ; 139.945,44.972 cw(c139.473,44.5) 140.141,44.5 ccw(c139.473,44.5) 139.945,44.972 ; CO3.2@145.368,56.492 cw(c143.075,54.199) 146.318,54.199 ccw(c143.075,54.199) CO3.2@145.368,56.492 ; CO3.2@145.637,56.761 cw(c143.994,55.118) 146.318,55.118 ccw(c143.994,55.118) CO3.2@145.637,56.761 ; CO3.2@145.907,57.031 cw(c144.914,56.038) 146.318,56.038 ccw(c144.914,56.038) CO3.2@145.907,57.031 ; AM3.1@146.223,47.323 cw(c145.992,47.092) 146.318,47.092 ccw(c145.992,47.092) AM3.1@146.223,47.323 ; AM3.1@146.223,47.477 ccw(c145.992,47.708) 146.318,47.708 cw(c145.992,47.708) AM3.1@146.223,47.477 ; AM3.1@146.223,48.577 ccw(c145.992,48.808) 146.318,48.808 cw(c145.992,48.808) AM3.1@146.223,48.577 ; CA1.2@151.693,52.726 ccw(c151.314,53.105) 151.85,53.105 cw(c151.314,53.105) CA1.2@151.693,52.726 ; 151.85,53.063 ccw(c152.326,53.063) 151.989,52.726 cw(c152.326,53.063) 151.85,53.063 ; 152.068,51.389 cw(c151.198,50.519) 152.428,50.519 ccw(c151.198,50.519) 152.068,51.389 ; CA3.2@153.229,50.869 ccw(c153.689,50.879) 153.689,50.419 cw(c153.689,50.879) CA3.2@153.229,50.869 ; 155.76,52.1 ccw(c154.66,53.2) 156.215,53.2 cw(c154.66,53.2) 155.76,52.1 ; 156.122,52.462 cw(c156.71,51.874) 156.71,52.706 ccw(c156.71,51.874) 156.122,52.462 ; IC1.1@156.441,55.095 cw(c155.429,54.083) 156.86,54.083 ccw(c155.429,54.083) IC1.1@156.441,55.095 ; 156.86,54.155 cw(c158.189,54.155) 157.249,55.095 ccw(c158.189,54.155) 156.86,54.155 ; 160.574,58.161 ccw(c160.574,59.372) 161.43,58.516 cw(c160.574,59.372) 160.574,58.161 ; 160.598,58.161 cw(c160.598,56.984) 161.43,57.816 ccw(c160.598,56.984) 160.598,58.161 ; C9.2@161.58,57.816 cw(c160.748,56.984) 161.925,56.984 ccw(c160.748,56.984) C9.2@161.58,57.816 ; 161.925,56.96 cw(c163.136,56.96) 162.28,57.816 ccw(c163.136,56.96) 161.925,56.96
  Bottom Layer w0.508: v6(125.857,41.656) R9.2@127.686,41.656 ; v14(144.075,61.25) 144.075,58.747 CO3.2@145.799,57.023 ; C12.2@125.96,41.432 cw(c126.501,40.891) 126.501,41.656 ccw(c126.501,40.891) C12.2@125.96,41.432 ; 144.696,58.126 ccw(c145.799,59.229) 145.799,57.669 cw(c145.799,59.229) 144.696,58.126 ; 144.938,57.884 cw(c144.176,57.123) 145.253,57.123 ccw(c144.176,57.123) 144.938,57.884
  Bottom Layer w0.762: v12(143.775,72.775) 143.775,66.075 v12(144.05,65.8) ; 143.855,66.383 cw(c143.227,66.021) v12@143.927,65.833 ; 143.775,66.771 ccw(c145.021,66.771) 144.14,65.89 cw(c145.021,66.771) 143.775,66.771
  Bottom Layer w2.54: v4(123.87,77.036) 124.486,77.036 129.7,82.25 137.9,82.25 ; v4(135.3,77.163) 135.3,79.65 137.9,82.25 ; C7.2@138.675,93.775 138.675,85.781 CON1.1@142.05,82.406 ; C8.2@145.9,93.625 145.9,86.256 CON1.1@142.05,82.406 ; v4(154.223,77.163) 154.223,80.302 152.218,82.307 ; v4(165.653,77.163) 165.653,80.422 163.768,82.307 152.218,82.307 ; R20.2@134.798,80.297 cw(c133.585,79.084) 135.3,79.084 ; R20.2@134.798,80.297 cw(c133.585,79.084) 135.3,79.084 ; R20.2@134.798,80.297 cw(c133.585,79.084) 135.3,79.084 ; R20.2@134.798,80.297 cw(c133.585,79.084) 135.3,79.084 ; 137.9,82.25 141.894,82.25 CON1.1@142.05,82.406 ; CON1.1@142.05,82.406 142.149,82.307 152.218,82.307 ; R20.2@134.384,79.298 ccw(c134.384,80.66) 135.347,79.697 cw(c134.384,80.66) R20.2@134.384,79.298 ; 153.258,81.267 cw(c152.191,80.2) 153.7,80.2 ccw(c152.191,80.2) 153.258,81.267 ; R29.2@153.829,80.614 cw(c152.877,79.662) 154.223,79.662 ccw(c152.877,79.662) R29.2@153.829,80.614 ; 164.935,81.14 cw(c163.805,80.01) 165.403,80.01 ccw(c163.805,80.01) 164.935,81.14
  other v1: 147.5,42.375 158.15,42.8 138.05,42.95 156.525,43.775 160.025,43.775 147.9,44.175 118.125,44.5 120.475,44.675 118.95,45.4 148.475,45.4 146.85,45.55 160.675,45.55 155.875,45.65 157.9,45.65 119.5,46.3 117.65,46.45 161.4,47.1 156.35,47.35 118.525,47.425 159.525,47.5 108.225,47.65 109.625,47.9 135.45,48 136.6,48.325 162.3,48.4 158.725,48.8 135.45,48.9 160.35,49.15 108.225,49.425 136.1,49.475 109.825,49.575 135.2,49.95 162.05,50.025 135.625,50.35 112.675,50.675 128.3,51 109.05,51.3 129.425,51.65 135.375,51.9 127,52.15 113.175,52.225 130.175,52.3 128.7,52.55 129.025,52.55 109.775,52.625 107.8,52.85 113.5,53.85 108.025,54.05 109.875,54.875 113,55 107.2,55.725 108.35,56.1 152.3,57.6 153.675,57.925 157.6,58.35 159.275,58.625 154.5,58.9 152.45,59.15 157.6,59.775 159.825,60.05 153.675,60.775 159.075,60.775 152.225,60.85 116.825,60.925 157.525,61.25 165.325,61.275 150.5,61.75 115.45,61.825 148.625,61.825 164.325,61.925 116.975,62 138.475,62.075 153.85,62.075 140.25,62.15 147,62.225 133.825,62.325 137.075,62.325 152.05,62.325 128.225,62.4 131.95,62.4 141.725,62.4 163.375,62.425 149.45,62.475 130.175,62.55 135.775,62.55 152.55,62.55 118.05,62.65 122.775,62.65 124.15,62.65 125.6,62.65 126.825,62.65 165.95,62.75 164.875,62.95 161.9,63.1 116.575,63.3 163.975,63.45 117.4,63.625 163,63.75 115.275,63.875 161.55,64.2 164.575,64.2 115.6,64.75 145.425,65.45 158.275,65.65 105.775,66.675 105.875,68.075 105.875,68.85 126.95,68.975 105.875,70.2 142.95,71.375 105.85,71.425 141.775,71.675 164.725,71.8 146,72.4 163.925,72.475 142.225,72.6 105.85,72.95 164.9,72.975 145.875,73.425 141.025,73.475 144.7,73.525 164,73.55 142.275,73.65 154.675,73.75 165.225,74.2 105.85,74.275 153.325,74.45 164.1,74.675 105.85,75.175 154.75,75.3 153.525,75.45 152.375,75.675 165.075,75.75 164.325,76.3 105.75,76.45 122.8,76.65 128,76.7 109.425,76.825 152.825,76.975 124.8,77.075 114.85,77.125 110.85,77.15 113.45,77.2 112,77.225 141.75,77.5 116.175,77.525 164.325,77.525 144.625,77.575 122.5,77.625 108.7,77.875 124.375,77.925 127.875,77.925 123.15,78.125 140.775,78.125 143.15,78.175 110.175,78.325 112.575,78.7 144.725,78.85 111.4,78.9 114.075,79.175 115.375,79.175 142.225,79.4 140.7,79.45 145.825,79.95 143.875,80 127.2,80.975 145.825,81.1 128.425,81.475 128.55,82.575 127.45,82.7 145.525,83.675 128.3,84.725 146.75,84.9 144.25,85.275 140.15,85.875 142.475,85.875 145.1,86.3 144.55,87.025 146.15,88.5 146.925,89.125 145.225,90.15 138.575,90.95 146.625,91.75 157.75,92.475 158.675,92.475 139.125,92.6 145.4,92.9 127.625,92.975 126.275,93.75 157.15,93.75 138.125,93.825 159.1,94.2 146.825,94.25 158,94.3 127.2,94.425 128.55,95.1 139.175,95.4 156.85,95.475 126.525,95.725 158.25,95.85 127.675,95.9 137.525,96.15 117.9,96.95 167.4,97.125 167.35,99.5 117.85,99.7 126.15,101.9 117.85,101.95 127.675,101.95 167.35,101.95 145.9,102.2 137.775,102.375 156.85,102.45 158.5,102.55 138.625,102.625 144.8,102.875 137.525,103.175 146.025,103.425 126.9,103.725 146.75,103.85 136.85,103.9 157.45,104.1 138.75,104.15 145.6,104.2 144,104.325
  other v3: 146.3,47.4 146.3,48.5 153.5,50.875
  other v5: 105.55,60.85
MAN_O: Q1.3 Q2.3 R1.2 U1.1 | length 38.2
  Top Layer w0.381: v1(62.23,82.85) 63.83,81.25 v2(75.55,81.25)
  Bottom Layer w0.381: v2(75.55,81.25) 79.425,81.25 81.075,79.6 81.075,76.7 81.062,76.713 81.062,76.7 86.85,70.913 v1(86.85,70.678) 88.885,70.678 R1.2@88.9,70.663 ; 85.729,72.034 cw(c84.373,70.678) Q2.3@86.291,70.678 ; 86.379,71.384 cw(c85.673,70.678) Q2.3@86.672,70.678 ; 86.497,71.266 cw(c85.909,70.678) Q2.3@86.74,70.678 ; Q2.3@87.03,70.733 cw(c86.974,70.678) Q2.3@87.053,70.678 ; 88.358,70.678 cw(c88.358,70.12) 88.752,70.515 ccw(c88.358,70.12) 88.358,70.678 ; 88.431,70.678 ccw(c88.431,71.132) 88.752,70.811 cw(c88.431,71.132) 88.431,70.678
MPU_3V3: C27.2 C29.2 C30.1 C31.1 C32.1 C36.2 C37.1 D3.1 D4.2 D5.2 D13.2 F1.2 JTAG1.1 L2.1 MIC_SD1.4 OLED1.2 R11.1 R32.1 R33.1 R34.1 R35.1 R36.1 R37.1 R39.2 TMB1.1 U2.5 U2.16 U2.43 U2.56 U2.70 U2.94 U2.108 U2.122 U2.135 Y1.4 | length 245.7
  Top Layer w0.33: R34.1@47.125,84.7 R34.1@47.15,84.725 ; R35.1@47.15,86.9 R35.1@47.175,86.925 ; U2.43@61.814,65.981 61.797,65.998 61.797,68.147 62.375,68.725 v1(63.625,68.725) ; 63.299,68.725 cw(c63.299,68.399) 63.53,68.63 ccw(c63.299,68.399) 63.299,68.725 ; 63.299,68.725 ccw(c63.299,69.051) 63.53,68.82 cw(c63.299,69.051) 63.299,68.725
  Top Layer w0.381: R34.1@47.125,84.7 R33.1@47.125,82.55 R32.1@47.125,81.425 51.175,77.375 55.411,77.375 ; R34.1@47.15,84.725 R35.1@47.15,86.9 ; R35.1@47.175,86.925 R37.1@47.175,88.025 R36.1@47.175,89.125 ; L2.1@48.138,72.263 48.138,72.428 49.655,73.945 51.981,73.945 55.411,77.375 ; v2(53.425,89.3) 54.2,90.075 62.3,90.075 63.307,89.068 63.307,87.188 U2.135@63.314,87.181 63.314,85.539 v2(63.3,85.525) 61.243,83.468 60.25,83.468 ; U2.16@56.964,77.831 56.957,77.824 55.86,77.824 55.411,77.375 ; U2.5@56.964,83.331 58.847,83.331 58.984,83.468 60.25,83.468 ; U2.16@56.971,77.824 59.031,77.824 v2(59.055,77.8) 60.25,78.995 60.25,83.468 ; v2(68.325,64.15) 68.314,64.161 U2.56@68.314,65.981 68.314,69.311 v2(67.45,70.175) 67.975,70.7 75.8,70.7 v2(76.375,71.275) 75.025,72.625 75.025,77.5 v2(75.85,78.325) 78.158,78.325 U2.94@78.164,78.331 ; U2.122@69.814,87.181 69.814,85.126 v1(69.85,85.09) 75.692,85.09 v1(75.946,85.344) 75.959,85.331 U2.108@78.164,85.331 ; v2(74.225,63.575) 75.314,64.664 U2.70@75.314,65.981 ; v1(82.575,60.175) 84.067,60.175 F1.2@85.09,59.152 ; 47.125,81.931 cw(c46.619,81.931) 46.977,81.573 ccw(c46.619,81.931) 47.125,81.931 ; 47.125,81.931 ccw(c47.631,81.931) 47.273,81.573 cw(c47.631,81.931) 47.125,81.931 ; 47.125,82.044 cw(c47.631,82.044) 47.273,82.402 ccw(c47.631,82.044) 47.125,82.044 ; 47.125,82.044 ccw(c46.619,82.044) 46.977,82.402 cw(c46.619,82.044) 47.125,82.044 ; 47.125,83.056 cw(c46.619,83.056) 46.977,82.698 ccw(c46.619,83.056) 47.125,83.056 ; 47.125,83.056 ccw(c47.631,83.056) 47.273,82.698 cw(c47.631,83.056) 47.125,83.056 ; 47.15,85.231 cw(c46.644,85.231) 47.002,84.873 ccw(c46.644,85.231) 47.15,85.231 ; 47.15,85.231 ccw(c47.656,85.231) 47.298,84.873 cw(c47.656,85.231) 47.15,85.231 ; 47.175,87.431 cw(c46.669,87.431) 47.027,87.073 ccw(c46.669,87.431) 47.175,87.431 ; 47.175,87.431 ccw(c47.681,87.431) 47.323,87.073 cw(c47.681,87.431) 47.175,87.431 ; 47.175,87.519 cw(c47.681,87.519) 47.323,87.877 ccw(c47.681,87.519) 47.175,87.519 ; 47.175,87.519 ccw(c46.669,87.519) 47.027,87.877 cw(c46.669,87.519) 47.175,87.519 ; 47.175,88.531 cw(c46.669,88.531) 47.027,88.173 ccw(c46.669,88.531) 47.175,88.531 ; 47.175,88.531 ccw(c47.681,88.531) 47.323,88.173 cw(c47.681,88.531) 47.175,88.531 ; 47.175,88.619 cw(c47.681,88.619) 47.323,88.977 ccw(c47.681,88.619) 47.175,88.619 ; 47.175,88.619 ccw(c46.669,88.619) 47.027,88.977 cw(c46.669,88.619) 47.175,88.619 ; R34.1@47.002,84.577 cw(c46.705,84.28) 47.125,84.28 ccw(c46.705,84.28) R34.1@47.002,84.577 ; R35.1@47.027,86.777 cw(c46.73,86.48) 47.15,86.48 ccw(c46.73,86.48) R35.1@47.027,86.777 ; 47.125,84.159 cw(c47.716,84.159) 47.298,84.577 ccw(c47.716,84.159) 47.125,84.159 ; 47.15,86.359 cw(c47.741,86.359) 47.323,86.777 ccw(c47.741,86.359) 47.15,86.359 ; R32.1@47.417,81.425 ccw(c48.122,81.425) 47.623,80.927 cw(c48.122,81.425) R32.1@47.417,81.425 ; 58.691,77.824 cw(c58.691,77.436) 58.965,77.71 ccw(c58.691,77.436) 58.691,77.824 ; v2@63.21,85.615 ccw(c62.96,85.865) 63.314,85.865 cw(c62.96,85.865) v2@63.21,85.615 ; 68.314,64.483 ccw(c68.658,64.483) 68.415,64.24 cw(c68.658,64.483) 68.314,64.483 ; 69.814,85.441 ccw(c70.201,85.441) 69.927,85.167 cw(c70.201,85.441) 69.814,85.441
  Bottom Layer w0.33: D4.2@79.342,60.193 D4.2@79.375,60.16
  Bottom Layer w0.381: MIC_SD1.4@49.089,85.821 49.085,85.825 47.525,85.825 46.3,87.05 46.3,90.975 47.743,92.418 50.369,92.418 51.474,91.313 OLED1.2@52.451,91.313 53.425,90.339 v2(53.425,89.3) ; JTAG1.1@53.213,58.547 56.06,55.7 68,55.7 72.493,60.193 R39.2@76.2,60.193 ; TMB1.1@60.579,47.244 60.579,48.954 67.325,55.7 ; v2(63.3,85.525) 64.2,84.625 69.385,84.625 ; C37.1@63.625,68.2 v1(63.625,68.725) 63.625,70.465 D3.1@63.645,70.485 65.335,72.175 67,72.175 67.45,71.725 v2(67.45,70.175) ; v2(68.325,64.15) 68.9,63.575 v2(74.225,63.575) 74.225,62.168 R39.2@76.2,60.193 ; 68.991,84.745 cw(c69.454,83.943) C32.1@69.777,84.811 ; C32.1@69.453,84.984 ccw(c69.453,85.348) C32.1@69.758,85.15 ; v1(69.85,85.09) 69.385,84.625 ; 75.403,85.089 ccw(c75.249,85.664) C30.1@75.765,85.366 ; 75.471,85.107 ccw(c75.309,85.711) C30.1@75.851,85.399 ; 75.525,85.122 cw(c75.633,84.719) C30.1@75.841,85.08 ; C30.1@75.547,85.149 cw(c75.806,84.89) C30.1@75.914,85.239 ; v2(75.85,78.325) 74.825,79.35 74.825,84.55 75.619,85.344 v1(75.946,85.344) ; D4.2@79.342,60.193 R39.2@76.2,60.193 ; D4.2@79.375,60.16 R11.1@81.882,60.16 ; 53.425,89.781 cw(c52.919,89.781) 53.277,89.423 ccw(c52.919,89.781) 53.425,89.781 ; 53.425,89.781 ccw(c53.931,89.781) 53.573,89.423 cw(c53.931,89.781) 53.425,89.781 ; C37.1@63.479,68.347 ccw(c63.126,68.7) v1@63.625,68.7 ; C37.1@63.479,68.347 ccw(c63.126,68.7) v1@63.625,68.7 ; C37.1@63.479,68.347 ccw(c63.126,68.7) v1@63.625,68.7 ; C37.1@63.479,68.347 ccw(c63.126,68.7) v1@63.625,68.7 ; C37.1@63.479,68.347 ccw(c63.126,68.7) v1@63.625,68.7 ; C37.1@63.479,68.347 ccw(c63.126,68.7) v1@63.625,68.7 ; v1@63.625,68.71 ccw(c64.138,68.71) C37.1@63.775,68.347 ; v1@63.625,68.71 ccw(c64.138,68.71) C37.1@63.775,68.347 ; v1@63.625,68.71 ccw(c64.138,68.71) C37.1@63.775,68.347 ; v1@63.625,68.71 ccw(c64.138,68.71) C37.1@63.775,68.347 ; v1@63.625,68.71 ccw(c64.138,68.71) C37.1@63.775,68.347 ; v1@63.625,68.71 ccw(c64.138,68.71) C37.1@63.775,68.347 ; 69.282,84.913 cw(c69.638,84.297) C32.1@69.822,84.984 ; 69.282,84.913 cw(c69.638,84.297) C32.1@69.822,84.984 ; 69.282,84.913 cw(c69.638,84.297) C32.1@69.822,84.984 ; 69.385,84.625 cw(c69.806,84.204) 69.838,84.798 ccw(c69.806,84.204) 69.385,84.625 ; 69.453,84.587 ccw(c69.165,85.085) C32.1@69.741,85.089 ; 69.453,84.587 ccw(c69.165,85.085) C32.1@69.741,85.089 ; 69.453,84.587 ccw(c69.165,85.085) C32.1@69.741,85.089 ; 73.637,63.575 cw(c73.637,63.069) 73.994,63.427 ccw(c73.637,63.069) 73.637,63.575 ; 73.637,63.575 ccw(c73.637,64.081) 73.994,63.723 cw(c73.637,64.081) 73.637,63.575 ; 74.225,63.069 cw(c74.731,63.069) 74.373,63.427 ccw(c74.731,63.069) 74.225,63.069 ; 74.225,63.069 ccw(c73.719,63.069) 74.077,63.427 cw(c73.719,63.069) 74.225,63.069 ; 48.244,85.825 cw(c48.244,85.426) 48.526,85.708 ccw(c48.244,85.426) 48.244,85.825 ; 48.264,85.825 ccw(c48.264,86.196) 48.526,85.934 cw(c48.264,86.196) 48.264,85.825 ; 68.421,84.625 ccw(c68.421,86.437) 69.702,85.156 cw(c68.421,86.437) 68.421,84.625 ; 69.341,84.625 ccw(c69.341,85.517) 69.971,84.886 cw(c69.341,85.517) 69.341,84.625 ; 75.201,84.926 cw(c75.946,84.181) 75.946,85.235 ccw(c75.946,84.181) 75.201,84.926 ; D4.2@78.567,60.193 cw(c78.567,59.867) 78.798,60.098 ccw(c78.567,59.867) D4.2@78.567,60.193 ; D4.2@78.952,60.098 cw(c79.183,59.867) 79.183,60.193 ccw(c79.183,59.867) D4.2@78.952,60.098 ; D4.2@79.527,60.16 ccw(c79.527,60.554) 79.806,60.275 cw(c79.527,60.554) D4.2@79.527,60.16 ; D4.2@79.96,60.275 ccw(c80.239,60.554) 80.239,60.16 cw(c80.239,60.554) D4.2@79.96,60.275
  other v1: 78.875,60.175 79.883,60.198
Net*1_1: *1.1 R3.1 | length 7.3
  Bottom Layer w0.33: *1.1@99.28,41.95 *1.1@99.3,41.93
  Bottom Layer w0.381: R3.1@96.5,43.15 98.08,43.15 ; *1.1@98.382,42.069 ccw(c97.271,42.341) 98.08,43.15 ; 98.55,42.68 ccw(c98.95,43.081) *1.1@98.95,42.514 ; 98.559,42.671 cw(c98.04,42.153) *1.1@98.752,41.978 ; *1.1@99.28,41.95 98.08,43.15 ; 97.088,43.15 cw(c97.088,43.656) 96.731,43.298 ccw(c97.088,43.656) 97.088,43.15 ; 97.088,43.15 ccw(c97.088,42.644) 96.731,43.002 cw(c97.088,42.644) 97.088,43.15
NetC12_1: C12.1 IC2.3
  other v6: 125.857,42.926
NetC17_1: C17.1 C19.2 D10.1 ENG1.1 IR2.6 Q5.3 Q7.1 R16.2 | length 46.7
  Top Layer w0.381: Q7.1@133.02,83.563 136.975,79.608 136.975,74.7 135.2,72.925 135.2,67.875 135.892,67.183 IR2.6@136.866,67.183 138.554,67.183 v3(139.065,66.672) ; 135.691,67.42 cw(c135.53,66.816) IR2.6@136.071,67.128 ; 135.511,67.564 ccw(c136.166,68.218) 136.166,67.292 cw(c136.166,68.218) 135.511,67.564
  Top Layer w2.54: Q7.1@133.02,83.563 133.02,84.912 ENG1.1@128.651,89.281 131.542,89.281 v4(134.919,92.657)
  Bottom Layer w0.381: R16.2@133.98,95.25 133.98,93.368 D10.1@134.765,92.583 ; D10.1@134.257,93.091 ccw(c134.919,93.753) 134.919,92.817 cw(c134.919,93.753) D10.1@134.257,93.091
  Bottom Layer w1.016: C17.1@127.95,86.925 127.95,88.58 ENG1.1@128.651,89.281
NetC17_2: C17.2 C18.2 D9.1 ENG1.2 IR1.6 Q4.3 Q6.1 R15.2 | length 44.8
  Top Layer w0.381: Q6.1@121.59,83.436 121,82.847 121,68 121.817,67.183 IR1.6@122.896,67.183 125.092,67.183 v3(125.222,67.053) ; 121.721,67.42 cw(c121.56,66.816) IR1.6@122.101,67.128 ; 121.362,67.638 ccw(c122.196,68.472) 122.196,67.292 cw(c122.196,68.472) 121.362,67.638
  Top Layer w2.54: Q6.1@121.59,83.436 125.603,87.45 ENG1.2@125.603,89.281 125.603,91.051 v4(123.997,92.657)
  Bottom Layer w0.381: R15.2@122.677,95.123 122.677,93.368 D9.1@123.462,92.583 ; D9.1@123.305,93.002 cw(c123.07,92.122) D9.1@123.859,92.578 ; D9.1@122.685,93.36 ccw(c123.997,94.673) 123.997,92.817 cw(c123.997,94.673) D9.1@122.685,93.36 ; D9.1@123.335,92.71 ccw(c123.997,93.372) 123.997,92.436 cw(c123.997,93.372) D9.1@123.335,92.71
  Bottom Layer w1.016: ENG1.2@125.603,89.281 126.35,88.534 C17.2@126.35,86.925
NetC18_1: C18.1 D7.2 IR1.8 | length 2.9
  Bottom Layer w0.381: D7.2@122.446,70.231 124.844,70.231 C18.1@125.222,69.853
  other v1: 122.428,69.723 123.317,69.723
NetC19_1: C19.1 D8.2 IR2.8 | length 26.6
  Bottom Layer w0.381: D8.2@136.966,70.008 ccw(c137.401,70.458) D8.2@137.412,69.832 ; D8.2@137.274,69.701 cw(c137.629,69.268) 137.878,69.769 cw(c138.165,70.346) D8.2@137.523,70.29 ; D8.2@137.562,69.926 ccw(c138.06,70.49) C19.1@138.56,69.928 ; 137.884,69.641 ccw(c138.348,70.166) C19.1@138.813,69.643 ; 138.028,70.006 ccw(c138.343,70.363) C19.1@138.616,69.972 ; 138.115,69.928 cw(c137.64,69.39) C19.1@138.357,69.434 ; C19.1@139.065,69.472 138.306,70.231 D8.2@136.416,70.231 ; D8.2@136.416,70.231 cw(c136.416,67.783) 138.457,69.135 ccw(c136.416,67.783) D8.2@136.416,70.231 ; D8.2@136.627,70.179 cw(c136.355,69.086) D8.2@137.32,69.667 ; D8.2@136.627,70.179 cw(c136.355,69.086) D8.2@137.32,69.667 ; D8.2@136.627,70.179 cw(c136.355,69.086) D8.2@137.32,69.667 ; D8.2@137.372,69.799 cw(c137.836,69.42) 137.991,69.999 ; D8.2@137.372,69.799 cw(c137.836,69.42) 137.991,69.999 ; D8.2@137.372,69.799 cw(c137.836,69.42) 137.991,69.999 ; D8.2@137.485,70.464 ccw(c138.184,70.718) 137.991,69.999 ; D8.2@137.485,70.464 ccw(c138.184,70.718) 137.991,69.999 ; D8.2@137.485,70.464 ccw(c138.184,70.718) 137.991,69.999 ; D8.2@137.126,70.231 cw(c137.126,68.253) 138.775,69.346 ccw(c137.126,68.253) D8.2@137.126,70.231 ; 137.835,70.231 cw(c137.835,68.723) 139.092,69.556 ccw(c137.835,68.723) 137.835,70.231
  other v1: 136.398,69.723 137.414,69.723
NetC20_1: C20.1 C22.2 D17.1 ENG2.1 IR4.6 Q10.3 Q12.1 R24.2 | length 53.4
  Top Layer w0.381: Q12.1@163.373,83.563 162.625,82.816 162.625,67.4 163.096,66.929 IR4.6@164.425,66.929 166.621,66.929 v3(166.751,66.799)
  Top Layer w2.54: Q12.1@163.373,83.563 159.25,87.686 ; v4(165.653,92.657) 162.445,89.45 ENG2.1@159.25,89.45 159.25,87.686 ; 159.25,87.686 ccw(c162.999,91.435) 163.29,86.141 cw(c162.999,91.435) 159.25,87.686
  Bottom Layer w0.381: R24.2@164.587,95.504 164.587,93.723 ; v4(165.653,92.657) 164.587,93.723 ; 164.587,93.723 cw(c164.321,93.457) 164.588,93.192 ccw(c164.321,93.457) 164.587,93.723 ; D17.1@165.381,92.93 cw(c165.108,92.657) 165.493,92.657 ccw(c165.108,92.657) D17.1@165.381,92.93 ; D17.1@165.381,92.93 ccw(c165.653,93.202) 165.653,92.817 cw(c165.653,93.202) D17.1@165.381,92.93
  Bottom Layer w1.016: C20.1@158.6,87.125 158.6,88.8 ENG2.1@159.25,89.45
NetC20_2: C20.2 C21.2 D16.1 ENG2.2 IR3.6 Q9.3 Q11.1 R25.2 | length 50.1
  Top Layer w0.381: IR3.6@150.582,67.056 152.905,67.056 v3(152.908,67.053) 153.928,67.053 157.175,70.3 157.175,88.477 ; Q11.1@151.943,83.563 Q11.1@152.006,83.5 ; ENG2.2@156.202,89.45 157.175,88.477 ; 157.175,88.477 cw(c157.533,88.835) 157.073,89.048 ccw(c157.533,88.835) 157.175,88.477 ; 157.175,88.477 ccw(c156.817,88.119) 156.604,88.579 cw(c156.817,88.119) 157.175,88.477
  Top Layer w2.54: Q11.1@151.943,83.563 151.943,85.191 ENG2.2@156.202,89.45 154.35,91.302 v4(154.35,92.657)
  Bottom Layer w0.381: R25.2@153.411,95.377 153.411,93.241 D16.1@154.069,92.583 ; D16.1@153.658,93.002 cw(c153.423,92.122) D16.1@154.212,92.578 ; D16.1@153.471,93.181 ccw(c154.35,94.059) 154.35,92.817 cw(c154.35,94.059) D16.1@153.471,93.181
  Bottom Layer w1.016: ENG2.2@156.202,89.45 156.202,87.923 C20.2@157,87.125
NetC21_1: C21.1 D14.2 IR3.8 | length 4.5
  Bottom Layer w0.381: D14.2@150.132,70.104 D14.2@150.383,69.853 ; D14.2@150.69,69.77 ccw(c150.885,69.957) D14.2@150.969,69.7 ; C21.1@152.908,69.853 D14.2@150.383,69.853 ; D14.2@150.383,69.853 cw(c150.383,69.255) 150.907,69.543 ccw(c150.383,69.255) D14.2@150.383,69.853
  other v1: 151.003,69.596
NetC22_1: C22.1 D15.2 IR4.8 | length 2.9
  Bottom Layer w0.381: D15.2@163.975,69.977 166.373,69.977 C22.1@166.751,69.599
  other v1: 163.957,69.469 164.846,69.469
NetCON1_2: CON1.2 SW_ENG1.1 | length 7
  Top Layer w2.54: CON1.2@142.05,89.899 SW_ENG1.1@142.05,96.85
NetD1_1: D1.1 IC2.1 L1.1 Q3.1 | length 22.7
  Top Layer w0.508: L1.1@122.425,57.401 v6(122.425,45.45) 126.008,45.45 IC2.1@126.024,45.466
  Top Layer w1.016: v7(117.875,54.275) 117.875,55.275 120.258,57.658 L1.1@122.682,57.658 L1.1@122.425,57.401
  other v9: 117.875,55.1
NetD2_2: D2.2 R7.1 | length 9.4
  Top Layer w0.381: D2.2@145.175,96.785 145.205,96.815 R7.1@147.05,96.815 ; D2.2@145.856,96.815 cw(c145.856,95.621) 146.7,96.465 ccw(c145.856,95.621) D2.2@145.856,96.815 ; D2.2@145.856,96.815 ccw(c145.856,98.009) 146.7,97.165 cw(c145.856,98.009) D2.2@145.856,96.815 ; D2.2@145.525,96.435 cw(c146.441,95.519) 146.441,96.815 ccw(c146.441,95.519) D2.2@145.525,96.435 ; D2.2@145.525,97.135 ccw(c146.296,97.906) 146.296,96.815 cw(c146.296,97.906) D2.2@145.525,97.135
NetD6_1: D6.1 R11.2
  other v7: 82.169,57.907
NetD9_2: D9.2 Q4.2 R12.1 R15.1 | length 14.6
  Bottom Layer w0.381: R12.1@119.126,89.789 119.126,92.347 v4(119.437,92.657) 119.437,94.413 ; D9.2@119.22,91.973 ccw(c118.544,92.364) D9.2@119.285,92.608 ; R15.1@120.147,95.123 119.437,94.413 ; 119.126,90.377 cw(c118.62,90.377) 118.978,90.02 ccw(c118.62,90.377) 119.126,90.377 ; 119.126,90.377 ccw(c119.632,90.377) 119.274,90.02 cw(c119.632,90.377) 119.126,90.377 ; D9.2@119.437,93.042 cw(c119.052,93.042) 119.324,92.77 ccw(c119.052,93.042) D9.2@119.437,93.042 ; D9.2@119.437,93.042 ccw(c119.822,93.042) 119.55,92.77 cw(c119.822,93.042) D9.2@119.437,93.042 ; 119.437,94.413 cw(c119.959,93.891) 119.982,94.629 ccw(c119.959,93.891) 119.437,94.413 ; 119.437,94.413 ccw(c119.099,94.751) 119.54,94.934 cw(c119.099,94.751) 119.437,94.413 ; 119.126,91.522 cw(c120.572,91.522) 119.55,92.545 ccw(c120.572,91.522) 119.126,91.522 ; D9.2@119.126,92.442 cw(c119.652,92.442) 119.28,92.814 ccw(c119.652,92.442) D9.2@119.126,92.442
NetD10_2: D10.2 Q5.2 R13.2 R16.1 | length 13.2
  Bottom Layer w0.381: v4(130.359,92.657) 131.445,91.571 R13.2@131.445,89.611 ; D10.2@130.497,92.578 cw(c131.286,92.122) D10.2@131.05,93.002 ; D10.2@130.665,92.583 131.45,93.368 R16.1@131.45,95.25 ; D10.2@130.631,92.385 cw(c130.903,92.657) 130.518,92.657 ccw(c130.903,92.657) D10.2@130.631,92.385 ; D10.2@130.631,92.385 ccw(c130.359,92.113) 130.359,92.498 cw(c130.359,92.113) D10.2@130.631,92.385 ; 131.445,90.199 cw(c130.939,90.199) 131.297,89.842 ccw(c130.939,90.199) 131.445,90.199 ; 131.445,90.199 ccw(c131.951,90.199) 131.593,89.842 cw(c131.951,90.199) 131.445,90.199 ; D10.2@130.359,92.817 ccw(c130.359,94.121) 131.281,93.199 cw(c130.359,94.121) D10.2@130.359,92.817 ; D10.2@131.069,91.899 cw(c131.057,91.511) 131.445,91.511 ccw(c131.057,91.511) D10.2@131.069,91.899
NetD11_2: D11.2 Q6.2 R17.1 R19.1 | length 13.8
  Top Layer w0.381: v4(119.31,77.036) 119.625,76.721 119.625,74.475 R17.1@119.45,74.3 ; Q6.2@119.462,76.988 ccw(c120.222,76.745) Q6.2@119.531,76.346 ; Q6.2@119.582,76.764 cw(c119.854,77.036) 119.469,77.036 ccw(c119.854,77.036) Q6.2@119.582,76.764 ; Q6.2@119.582,76.764 ccw(c119.31,76.492) 119.31,76.877 cw(c119.31,76.492) Q6.2@119.582,76.764 ; Q6.2@119.197,76.924 cw(c118.164,75.89) 119.625,75.89 ccw(c118.164,75.89) Q6.2@119.197,76.924 ; Q6.2@119.466,77.193 cw(c119.084,76.81) 119.625,76.81 ccw(c119.084,76.81) Q6.2@119.466,77.193 ; R17.1@119.502,74.556 ccw(c119.205,74.853) 119.625,74.853 cw(c119.205,74.853) R17.1@119.502,74.556 ; 119.625,74.974 ccw(c120.216,74.974) 119.798,74.556 cw(c120.216,74.974) 119.625,74.974
  Bottom Layer w0.381: D11.2@119.489,77.089 120.274,77.874 R19.1@120.274,79.883 ; D11.2@119.31,77.196 ccw(c119.31,77.887) 119.798,77.398 cw(c119.31,77.887) D11.2@119.31,77.196
NetD12_2: D12.2 Q7.2 R18.2 R20.1 | length 10.7
  Top Layer w0.381: Q7.2@130.74,77.035 131.54,77.035 R18.2@134.125,74.45 ; Q7.2@130.861,77.06 cw(c131.032,76.913) Q7.2@131.144,77.108 ; Q7.2@130.853,77.276 ccw(c131.434,77.857) 131.434,77.035 cw(c131.434,77.857) Q7.2@130.853,77.276
  Bottom Layer w0.381: D12.2@130.919,77.089 131.704,77.874 R20.1@131.704,79.883 ; D12.2@130.74,77.323 ccw(c130.74,78.32) 131.445,77.615 cw(c130.74,78.32) D12.2@130.74,77.323
  other v4: 130.74,77.163